# EAGLE board Proiect TSC v137 (EAGLE 9.7.0)
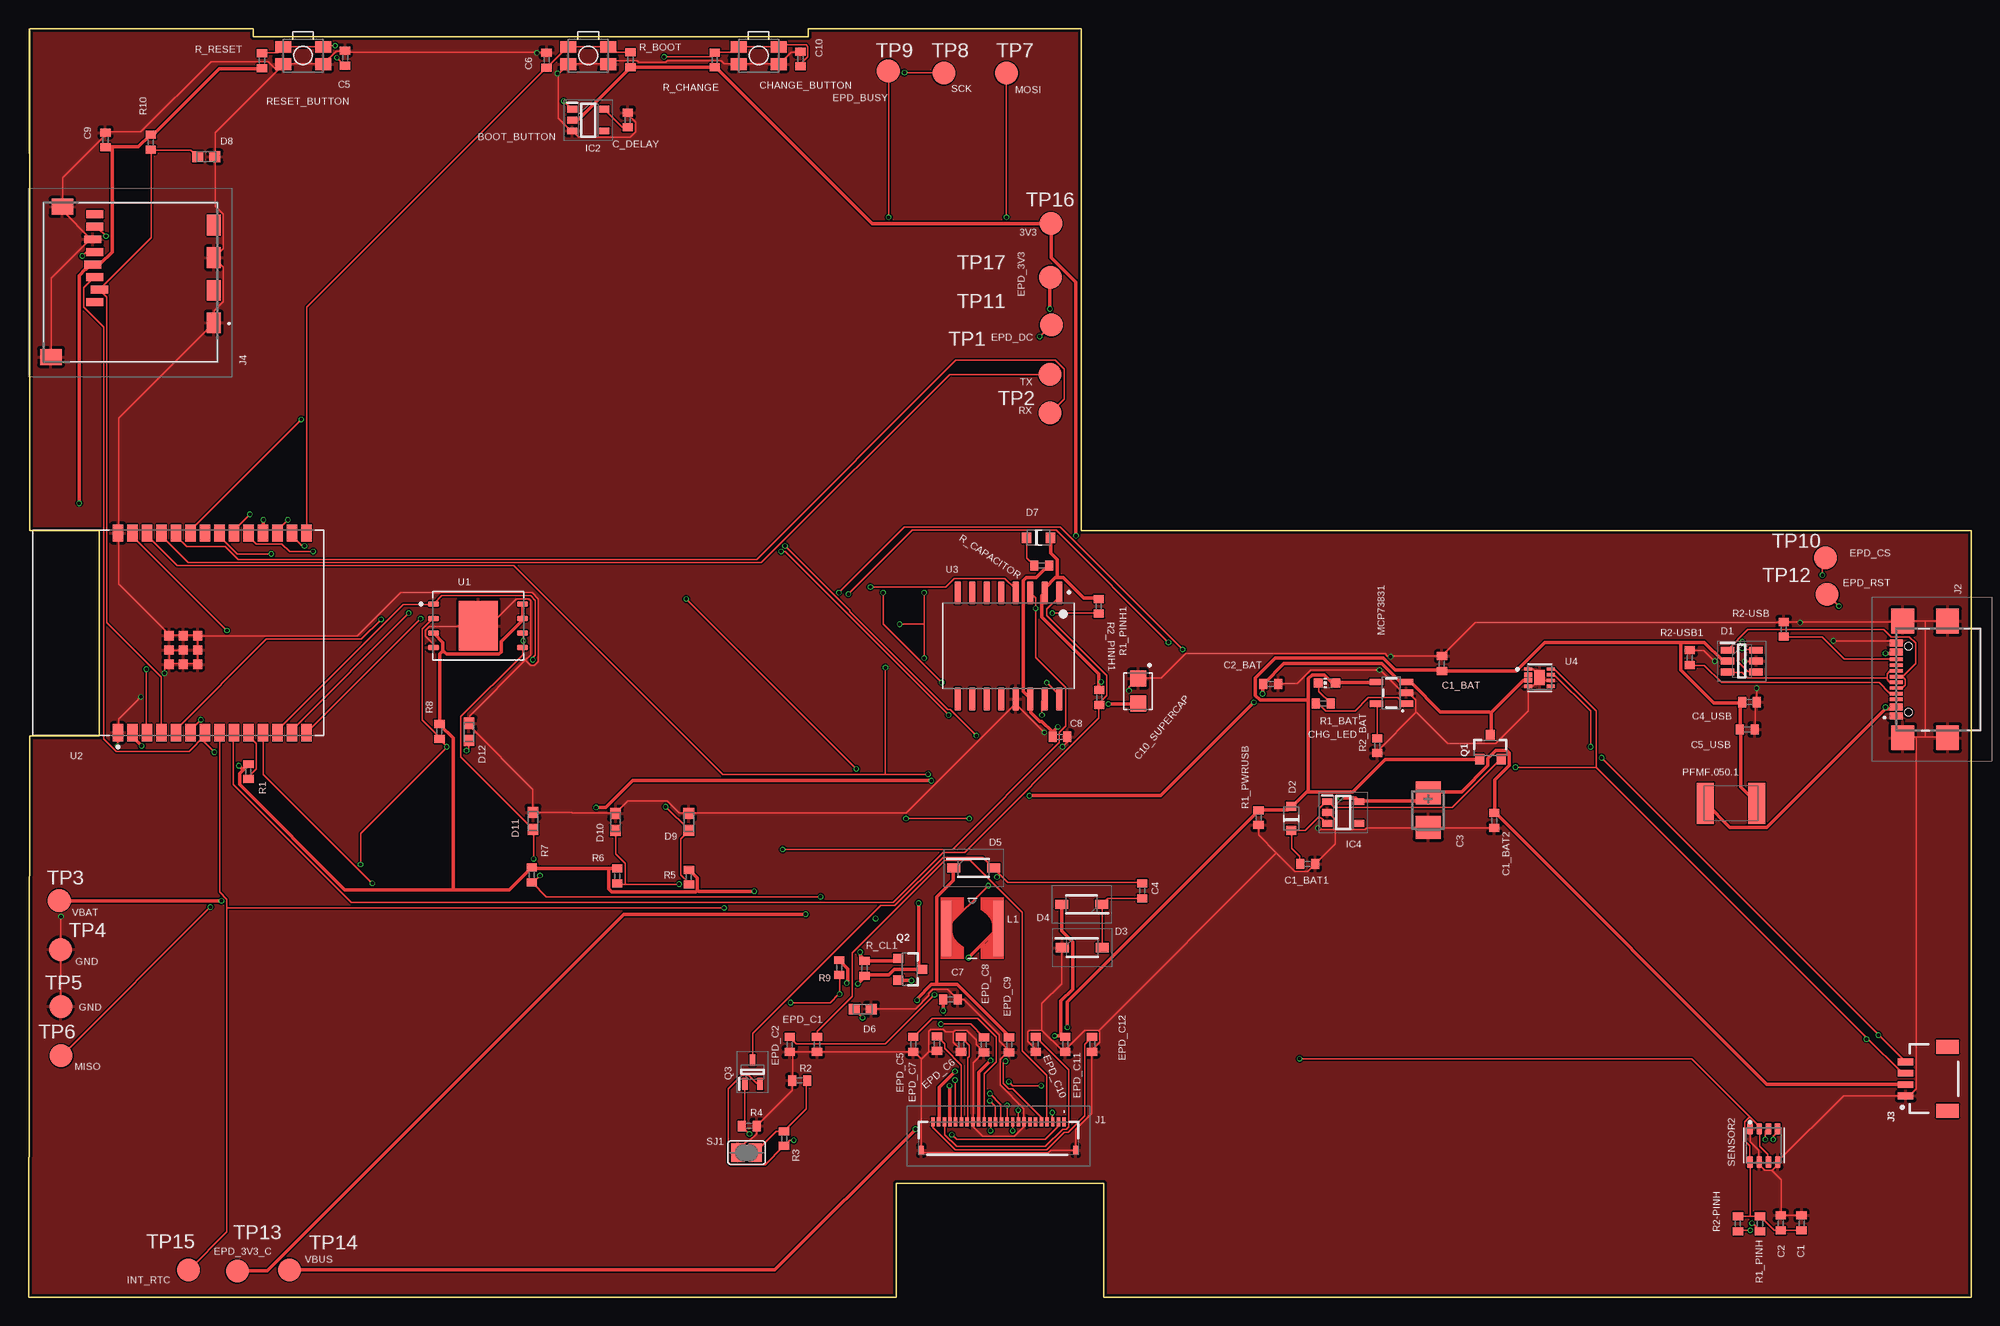
[diagram p0: board, top side]
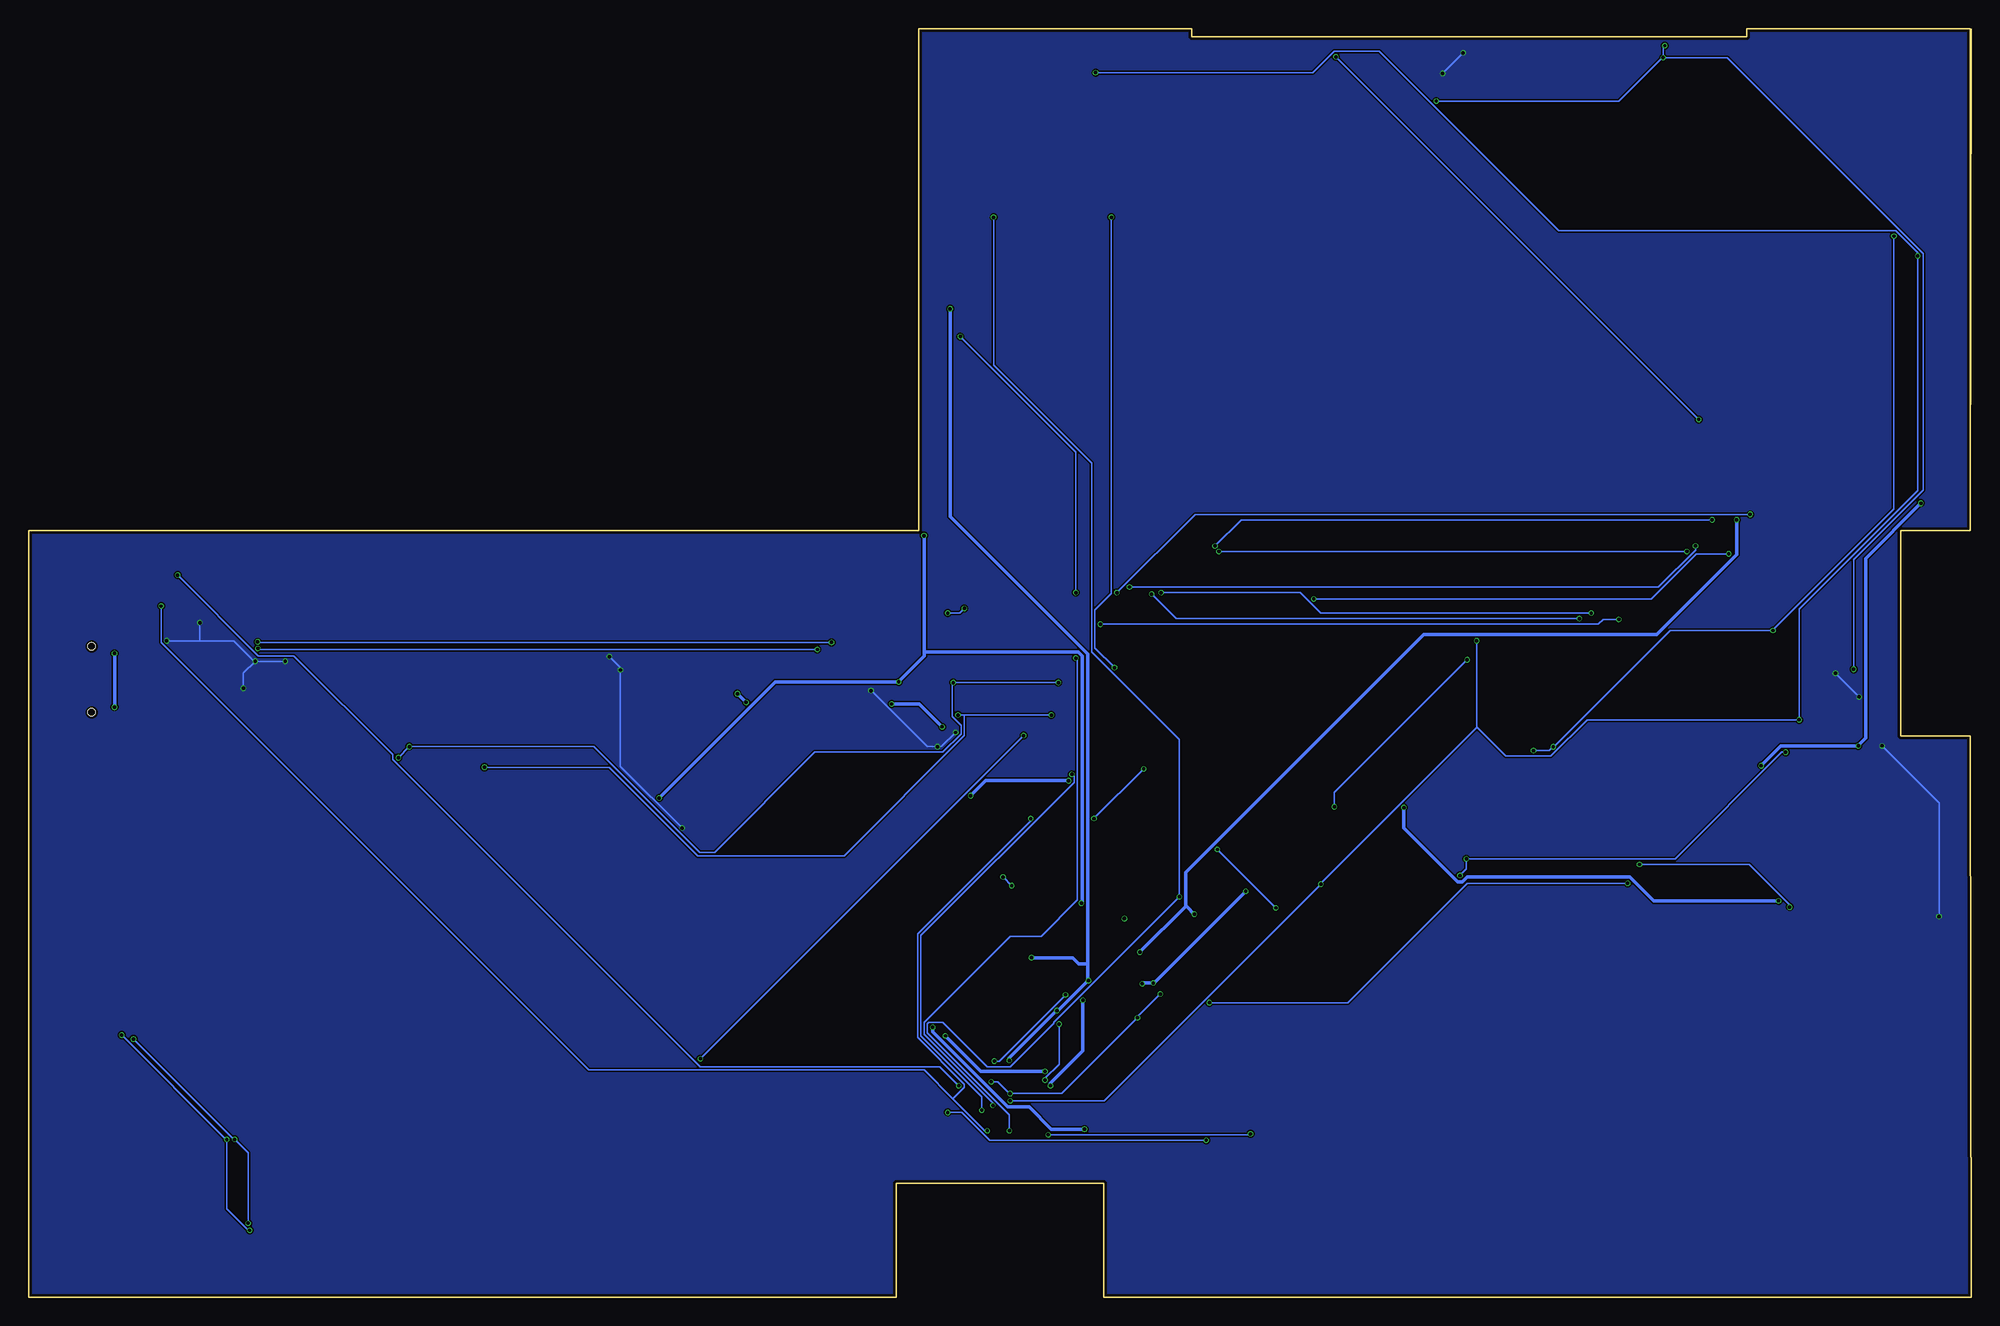
[diagram p1: board, bottom side, seen from below]

Size 170.2 x 111.2 mm. Coordinates in mm from the lower left corner, seen from the top.
Outline: 0,111.2 0.1,67.2
Outline: 0.1,67.2 6.2,67.2 6.2,49.21 0.1,49.21 0,0 76,0 76,10 94.2,10 94.2,0 170.2,0 170.2,67.2 92.2,67.2 92.2,111.2 68.3,111.2 68.3,110.5 19.7,110.5 19.7,111.2 0.1,111.2 0.1,67.2
Copper layers (1*16): Top 0.035mm / dielectric 1.6mm / Bottom 0.035mm
Design rules "jlcpcb-2layers2.dru *": minimum track width 0.15mm, minimum drill 0.3mm, track to track 5mil, track to pad 5mil, pad to pad 5mil, via to via 5mil, smd to smd 5mil, copper to edge 0.2mm, drill to drill 6mil, minimum pad ring 10mil, minimum via ring 3mil, stop-mask expansion 4mil, vias tented up to drill 0mil, thermal gap 10mil
Net classes: 1 power: width 0.3 mm

## Footprints (pad centres in the part's own frame; a part is rotated, then mirrored left to right if it is on the bottom)
MYBUTTON = smd 1.4 x 1.05: 1 1.75,0.75; 2 -1.75,0.75; 3 -1.75,-0.75; 4 1.75,-0.75
EAGLE-LTSPICE_C0402 = smd 0.7 x 0.9: 1 -0.65,0; 2 0.65,0
RCL_CT3528 = smd 2 x 2.2: + -1.5,0; - 1.5,0
ESP32_WROVER_EAGLE-LTSPICE_C0402 = smd 0.7 x 0.9: 1 -0.65,0; 2 0.65,0
CAPCP3225X100N = smd 1.4 x 1.4: 1 -1.1,0; 2 1.1,0
ADAFRUIT_CHIP-LED0603 = smd 0.8 x 0.8: A 0,-0.75; C 0,0.75
SOT95P280X145-6N = smd 1.2 x 0.6: 1 -1.25,0.95; 2 -1.25,0; 3 -1.25,-0.95; 4 1.25,-0.95; 5 1.25,0; 6 1.25,0.95
ESP32_WROVER_AVX---SD0805S020S1R0_AVX_SD0805S020S1R0_0 = smd 0.8 x 0.9: 1 -1.05,0; 2 1.05,0
SOD3716X135N = smd 1.15 x 0.8: 1 -1.75,0; 2 1.75,0
DIOC1608X36N = smd 0.97 x 0.94: 1 -0.75,0; 2 0.75,0
SOT95P280X125-5N = smd 0.9 x 0.6: 1 -1.4,0.95; 2 -1.4,0; 3 -1.4,-0.95; 4 1.4,-0.95; 5 1.4,0.95
SOT95P280X120-5N = smd 0.9 x 0.6: 1 -1.4,0.95; 2 -1.4,0; 3 -1.4,-0.95; 4 1.4,-0.95; 5 1.4,0.95
FH34SRJ24S05SH99 = smd 0.3 x 0.8: 1 5.75,1.45; 2 5.25,1.45; 3 4.75,1.45; 4 4.25,1.45; 5 3.75,1.45; 6 3.25,1.45; 7 2.75,1.45; 8 2.25,1.45; 9 1.75,1.45; 10 1.25,1.45; 11 0.75,1.45; 12 0.25,1.45; 13 -0.25,1.45; 14 -0.75,1.45; 15 -1.25,1.45; 16 -1.75,1.45; 17 -2.25,1.45; 18 -2.75,1.45; 19 -3.25,1.45; 20 -3.75,1.45; 21 -4.25,1.45; 22 -4.75,1.45; 23 -5.25,1.45; 24 -5.75,1.45 | smd 0.4 x 0.8: MP1 6.75,-1.05; MP2 -6.75,-1.05
SAMACSYS_PARTS_USB4110GFA = smd 0.3 x 1.15: A1 -3.35,3.678; A4 -2.55,3.678; A5 -1.25,3.678; A6 -0.25,3.678; A7 0.25,3.678; A8 1.25,3.678; A9 2.55,3.678; A12 3.35,3.678; B1 3.05,3.678; B4 2.25,3.678; B5 1.75,3.678; B6 0.75,3.678; B7 -0.75,3.678; B8 -1.75,3.678; B9 -2.25,3.678; B12 -3.05,3.678 | smd 2.18 x 2: MP1 -5.11,-0.827; MP2 5.11,-0.827; MP3 -5.11,3.103; MP4 5.11,3.103 | hole 0.65: -2.89,2.603; 2.89,2.603
JST04_1MM_RA = smd 0.6 x 1.35: 1 -1.5,0; 2 -0.5,0; 3 0.5,0; 4 1.5,0 | smd 1.2 x 2: NC1 2.8,-3.675; NC2 -2.8,-3.675
112ATAARR03ATTEND = smd 1.8 x 1.2: G1 10.6,10.4; G2 4.9,10.4; S1 7.75,10.4; S2 2.05,10.4 | smd 1.4 x 1.9: G3 13.6,-3.85; G4 0.45,-2.85 | smd 0.7 x 1.5: P1 8.8,0; P2 7.7,0.4; P3 6.6,0; P4 5.5,-0.2; P5 4.4,0; P6 3.3,-0.2; P7 2.2,0; P8 1.1,0
IND_4828-WE-TPC_WRE = smd 0.889 x 4.826: 1 -2.286,0; 2 2.286,0
ESP32_WROVER_SPARKFUN-IC-POWER_SOT23-5 = smd 0.55 x 1.2: 1 -0.95,-1.3; 2 0,-1.3; 3 0.95,-1.3; 4 0.95,1.3; 5 -0.95,1.3
ESP32C6_VARISTOR_CT/CN1812 = smd 1.5 x 3.6: 1 -2.25,0; 2 2.25,0
ESP32_WROVER_SPARKFUN-DISCRETESEMI_SOT23-3 = smd 0.8 x 0.9: 1 -0.95,-1; 2 0.95,-1; 3 0,1.1
SOT65P210X110-3N = smd 1.05 x 0.5: 1 -1.05,0.65; 2 -1.05,-0.65; 3 1.05,0
ESP32_WROVER_EAGLE-LTSPICE_R0402 = smd 0.7 x 0.9: 1 -0.65,0; 2 0.65,0
ESP32_WROVER_BME680_PSON80P300X300X100-8N = smd 1.016 x 0.5: 1 1.458,1.2; 2 1.458,0.4; 3 1.458,-0.4; 4 1.458,-1.2; 5 -1.458,-1.22; 6 -1.458,-0.4; 7 -1.458,0.4; 8 -1.458,1.2
SJ = smd 1.168 x 1.6: 1 -0.762,0; 2 0.762,0
TP20R = smd 2 x 2: TP 0,0
SON127P600X800X80-9N = smd 0.94 x 0.44: 1 -3.895,1.905; 2 -3.895,0.635; 3 -3.895,-0.635; 4 -3.895,-1.905; 5 3.895,-1.905; 6 3.895,-0.635; 7 3.895,0.635; 8 3.895,1.905 | smd 3.4 x 4.3: 9 0,0
XCVR_ESP32-C6-WROOM-1-N8 = smd 1.5 x 0.9: 1 -8.75,5.26; 2 -8.75,3.99; 3 -8.75,2.72; 4 -8.75,1.45; 5 -8.75,0.18; 6 -8.75,-1.09; 7 -8.75,-2.36; 8 -8.75,-3.63; 9 -8.75,-4.9; 10 -8.75,-6.17; 11 -8.75,-7.44; 12 -8.75,-8.71; 13 -8.75,-9.98; 14 -8.75,-11.25; 15 8.75,-11.25; 16 8.75,-9.98; 17 8.75,-8.71; 18 8.75,-7.44; 19 8.75,-6.17; 20 8.75,-4.9; 21 8.75,-3.63; 22 8.75,-2.36; 23 8.75,-1.09; 24 8.75,0.18; 25 8.75,1.45; 26 8.75,2.72; 27 8.75,3.99; 28 8.75,5.26 | smd 0.8 x 0.8: 29_1 -2.755,0.79; 29_2 -1.505,0.79; 29_3 -0.255,0.79; 29_4 -2.755,-0.46; 29_5 -1.505,-0.46; 29_6 -0.255,-0.46; 29_7 -2.755,-1.71; 29_8 -1.505,-1.71; 29_9 -0.255,-1.71
SOIC127P1032X265-16N = smd 2.05 x 0.59: 1 -4.655,4.445; 2 -4.655,3.175; 3 -4.655,1.905; 4 -4.655,0.635; 5 -4.655,-0.635; 6 -4.655,-1.905; 7 -4.655,-3.175; 8 -4.655,-4.445; 9 4.655,-4.445; 10 4.655,-3.175; 11 4.655,-1.905; 12 4.655,-0.635; 13 4.655,0.635; 14 4.655,1.905; 15 4.655,3.175; 16 4.655,4.445
SON50P200X200X80-9N = smd 0.76 x 0.27: 1 -0.985,0.75; 4 -0.985,-0.75; 5 0.985,-0.75; 6 0.985,-0.25; 7 0.985,0.25; 8 0.985,0.75 | smd 0.813 x 0.406: 2 -0.985,0.25; 3 -0.985,-0.25 | smd 0.9 x 1.3: 9 0,0

## Placement (x,y rotation side)
BOOT_BUTTON  BUTTON_CUSYOMV1  [MYBUTTON]  49.03,108.83 180 top
C1  100nF  [EAGLE-LTSPICE_C0402]  155.32,6.53 90 top
C1_BAT  4.7uF  [EAGLE-LTSPICE_C0402]  123.81,55.55 90 top
C1_BAT1  4.7uF  [EAGLE-LTSPICE_C0402]  112.05,37.99 0 top
C1_BAT2  4.7uF  [EAGLE-LTSPICE_C0402]  128.39,41.79 90 top
C2  100nF  [EAGLE-LTSPICE_C0402]  153.5,6.53 90 top
C2_BAT  4.7uF  [EAGLE-LTSPICE_C0402]  108.82,53.75 0 top
C3  100uF TANT  [RCL_CT3528]  122.61,42.7 270 top
C4  4.7uF/25V  [EAGLE-LTSPICE_C0402]  97.56,35.64 90 top
C4_USB  100nF  [EAGLE-LTSPICE_C0402]  150.75,52.17 0 top
C5  1uF  [EAGLE-LTSPICE_C0402]  27.73,108.61 90 top
C5_USB  4.7uf  [EAGLE-LTSPICE_C0402]  150.56,49.77 0 top
C6  100nF  [EAGLE-LTSPICE_C0402]  45.38,108.43 90 top
C7  10uF  [EAGLE-LTSPICE_C0402]  80.77,26.13 0 top
C8  100nF  [EAGLE-LTSPICE_C0402]  90.36,49.13 0 top
C9  100nF  [ESP32_WROVER_EAGLE-LTSPICE_C0402]  6.74,101.43 90 top
C10  100nF  [EAGLE-LTSPICE_C0402]  67.62,108.53 90 top
C10_SUPERCAP  CPH3225A  [CAPCP3225X100N]  97.19,53.14 270 top
C_DELAY  100nF  [EAGLE-LTSPICE_C0402]  52.49,103.19 90 top
CHANGE_BUTTON  BUTTON_CUSYOMV1  [MYBUTTON]  63.96,108.83 180 top
CHG_LED  [ADAFRUIT_CHIP-LED0603]  113.74,53.85 90 top
D1  USBLC6-2SC6Y  [SOT95P280X145-6N]  150.08,55.77 0 top
D2  ESP32_WROVER_AVX---SD0805S020S1R0_AVX_SD0805S020S1R0_0_0AVX_SD0805S020S1R0_0_0  [ESP32_WROVER_AVX---SD0805S020S1R0_AVX_SD0805S020S1R0_0]  110.62,41.98 90 top
D3  MBR0530  [SOD3716X135N]  92.31,30.65 0 top
D4  MBR0530  [SOD3716X135N]  92.25,34.45 180 top
D5  MBR0530  [SOD3716X135N]  82.79,37.65 0 top
D6  PGB1010603MR  [DIOC1608X36N]  73.08,25.27 0 top
D7  ESP32_WROVER_AVX---SD0805S020S1R0_AVX_SD0805S020S1R0_0_0AVX_SD0805S020S1R0_0_0  [ESP32_WROVER_AVX---SD0805S020S1R0_AVX_SD0805S020S1R0_0]  88.47,66.58 0 top
D8  PGB1010603MR  [DIOC1608X36N]  15.56,99.97 0 top
D9  PGB1010603MR  [DIOC1608X36N]  57.84,41.67 90 top
D10  PGB1010603MR  [DIOC1608X36N]  51.42,41.67 90 top
D11  PGB1010603MR  [DIOC1608X36N]  44.2,41.77 90 top
D12  PGB1010603MR  [DIOC1608X36N]  38.58,49.57 90 top
EPD_C1  1uF/50V  [EAGLE-LTSPICE_C0402]  69.07,22.17 90 top
EPD_C2  1uF/50V  [EAGLE-LTSPICE_C0402]  66.68,22.17 90 top
EPD_C5  0.1uF/50V  [EAGLE-LTSPICE_C0402]  77.51,22.19 90 top
EPD_C6  1uF/50V  [EAGLE-LTSPICE_C0402]  81.69,22.17 90 top
EPD_C7  1uF/50V  [EAGLE-LTSPICE_C0402]  79.58,22.25 90 top
EPD_C8  1uF/50V  [EAGLE-LTSPICE_C0402]  83.69,22.15 90 top
EPD_C9  1uF/50V  [EAGLE-LTSPICE_C0402]  85.9,22.15 90 top
EPD_C10  1uF/50V  [EAGLE-LTSPICE_C0402]  88.23,22.19 90 top
EPD_C11  1uF/50V  [EAGLE-LTSPICE_C0402]  90.81,22.19 90 top
EPD_C12  1uF/50V  [EAGLE-LTSPICE_C0402]  93.17,22.19 90 top
IC2  BD5229G-TR  [SOT95P280X125-5N]  49.03,103.18 0 top
IC4  XC6220A331MR-G  [SOT95P280X120-5N]  115.17,42.49 0 top
J1  FH34SRJ-24S-0.5SH_99_  [FH34SRJ24S05SH99]  84.97,13.94 0 top
J2  SAMACSYS_PARTS_USB4110-GF-A  [SAMACSYS_PARTS_USB4110GFA]  167.28,54.16 90 top
J3  QWIIC_RIGHT_ANGLE  [JST04_1MM_RA]  164.43,19.16 90 top
J4  112A-TAAR-R03_ATTEND  [112ATAARR03ATTEND]  5.82,96.02 270 top
L1  68uH  [IND_4828-WE-TPC_WRE]  82.67,32.35 0 top
MCP73831  ESP32_WROVER_SPARKFUN-IC-POWER_MCP73831  [ESP32_WROVER_SPARKFUN-IC-POWER_SOT23-5]  119.38,52.99 90 top
PFMF.050.1  ESP32C6_VARISTORCN1812  [ESP32C6_VARISTOR_CT/CN1812]  149.14,43.3 0 top
Q1  20V/4.2A/52mΩ/1.4W  [ESP32_WROVER_SPARKFUN-DISCRETESEMI_SOT23-3]  128.06,48.16 0 top
Q2  20V/4.2A/52mΩ/1.4W  [ESP32_WROVER_SPARKFUN-DISCRETESEMI_SOT23-3]  77.18,28.76 270 top
Q3  SI1308EDL-T1-GE3  [SOT65P210X110-3N]  63.42,19.75 90 top
R1  10K  [ESP32_WROVER_EAGLE-LTSPICE_R0402]  19.26,46.08 90 top
R1_BAT  200  [ESP32_WROVER_EAGLE-LTSPICE_R0402]  113.43,52.05 0 top
R1_PINH  10K  [ESP32_WROVER_EAGLE-LTSPICE_R0402]  151.68,6.47 90 top
R1_PINH1  10K  [ESP32_WROVER_EAGLE-LTSPICE_R0402]  93.75,60.57 90 top
R1_PWRUSB  100K  [ESP32_WROVER_EAGLE-LTSPICE_R0402]  107.75,42.04 90 top
R2  2.2  [ESP32_WROVER_EAGLE-LTSPICE_R0402]  67.55,19.01 0 top
R2-PINH  10K  [ESP32_WROVER_EAGLE-LTSPICE_R0402]  149.74,6.47 90 top
R2-USB  5k1  [ESP32_WROVER_EAGLE-LTSPICE_R0402]  153.75,58.55 90 top
R2-USB1  5k1  [ESP32_WROVER_EAGLE-LTSPICE_R0402]  145.52,56.07 90 top
R2_BAT  2K  [ESP32_WROVER_EAGLE-LTSPICE_R0402]  118.14,48.35 90 top
R2_PINH1  10K  [ESP32_WROVER_EAGLE-LTSPICE_R0402]  93.79,52.57 90 top
R3  0.47  [ESP32_WROVER_EAGLE-LTSPICE_R0402]  66.19,13.93 90 top
R4  10K  [ESP32_WROVER_EAGLE-LTSPICE_R0402]  63.13,15.03 0 top
R5  10K  [ESP32_WROVER_EAGLE-LTSPICE_R0402]  57.85,36.83 90 top
R6  10K  [ESP32_WROVER_EAGLE-LTSPICE_R0402]  51.57,36.93 90 top
R7  10K  [ESP32_WROVER_EAGLE-LTSPICE_R0402]  44.09,37.03 90 top
R8  10K  [ESP32_WROVER_EAGLE-LTSPICE_R0402]  35.99,49.61 90 top
R9  10K  [ESP32_WROVER_EAGLE-LTSPICE_R0402]  71.01,28.91 90 top
R10  10K  [ESP32_WROVER_EAGLE-LTSPICE_R0402]  10.71,101.23 89.5 top
R_BOOT  10K  [ESP32_WROVER_EAGLE-LTSPICE_R0402]  52.73,108.47 90 top
R_CAPACITOR  15  [ESP32_WROVER_EAGLE-LTSPICE_R0402]  88.75,64.14 0 top
R_CHANGE  10K  [ESP32_WROVER_EAGLE-LTSPICE_R0402]  60.12,108.44 90 top
R_CL1  10K  [ESP32_WROVER_EAGLE-LTSPICE_R0402]  73.23,28.85 90 top
R_RESET  10K  [ESP32_WROVER_EAGLE-LTSPICE_R0402]  20.45,108.39 90 top
RESET_BUTTON  BUTTON_CUSYOMV1  [MYBUTTON]  24.05,108.83 180 top
SENSOR2  BME688  [ESP32_WROVER_BME680_PSON80P300X300X100-8N]  152.01,13.32 90 top
SJ1  [SJ]  62.9,12.69 0 top
TP1  TPTP20R  [TP20R]  89.47,80.91 0 top
TP2  TPTP20R  [TP20R]  89.49,77.51 0 top
TP3  TPTP20R  [TP20R]  2.69,34.79 0 top
TP4  TPTP20R  [TP20R]  2.81,30.49 0 top
TP5  TPTP20R  [TP20R]  2.83,25.49 0 top
TP6  TPTP20R  [TP20R]  2.85,21.19 0 top
TP7  TPTP20R  [TP20R]  85.67,107.29 0 top
TP8  TPTP20R  [TP20R]  80.19,107.29 0 top
TP9  TPTP20R  [TP20R]  75.31,107.49 0 top
TP10  TPTP20R  [TP20R]  157.4,64.81 0 top
TP11  TPTP20R  [TP20R]  89.61,85.21 0 top
TP12  TPTP20R  [TP20R]  157.55,61.61 0 top
TP13  TPTP20R  [TP20R]  18.3,2.31 0 top
TP14  TPTP20R  [TP20R]  22.85,2.42 0 top
TP15  TPTP20R  [TP20R]  14,2.41 0 top
TP16  TPTP20R  [TP20R]  89.55,94.11 0 top
TP17  TPTP20R  [TP20R]  89.51,89.41 0 top
U1  W25Q512JVEIQ  [SON127P600X800X80-9N]  39.39,58.86 0 top
U2  ESP32-C6-WROOM-1-N8  [XCVR_ESP32-C6-WROOM-1-N8]  13.1,58.24 90 top
U3  DS3231SN#  [SOIC127P1032X265-16N]  85.85,57.1 270 top
U4  MAX17048G+T10  [SON50P200X200X80-9N]  132.37,54.32 0 top

## Library data of the parts
BOOT_BUTTON CHANGE_BUTTON CHG_LED PFMF.050.1 RESET_BUTTON SJ1 TP1-TP17 = DeskAssistant v19 v1
C1 C1_BAT C1_BAT1 C1_BAT2 C2 C2_BAT C4 C4_USB C5 C5_USB C6-C10 C_DELAY EPD_C1 EPD_C2 EPD_C5-EPD_C12 = DeskAssistant v19 v1; SPICEMODEL: NONE; SPICEPREFIX: C
C3 = DeskAssistant v19 v1; SPICEPREFIX: C
C10_SUPERCAP = DeskAssistant v19 v1; AVAILABILITY: Not in stock; CHECK_PRICES: https://www.snapeda.com/parts/CPH3225A/Seiko+Instruments/view-part/?ref=eda; DESCRIPTION: 11 mF (EDLC) Supercapacitor 3.3 V 1210 (3225 Metric) - -; MF: Seiko Instruments; MP: CPH3225A; PACKAGE: 1210 Seiko; PRICE: None; PURCHASE-URL: https://www.snapeda.com/api/url_track_click_mouser/?unipart_id=562593&manufacturer=Seiko Instruments&part_name=CPH3225A&search_term=None; SNAPEDA_LINK: https://www.snapeda.com/parts/CPH3225A/Seiko+Instruments/view-part/?ref=snap
D1 = DeskAssistant v19 v1; AVAILABILITY: In Stock; CHECK_PRICES: https://www.snapeda.com/parts/USBLC6-2SC6Y/STMicroelectronics/view-part/?ref=eda; DESCRIPTION: 17V Clamp 5A (8/20µs) Ipp Tvs Diode Surface Mount SOT-23-6; MF: STMicroelectronics; MP: USBLC6-2SC6Y; PACKAGE: SOT-23-6 STMicroelectronics; PRICE: None; SNAPEDA_LINK: https://www.snapeda.com/parts/USBLC6-2SC6Y/STMicroelectronics/view-part/?ref=snap
D2 D7 = DeskAssistant v19 v1; CENTROID_NOT_SPECIFIED: No; DATASHEET: http://datasheets.avx.com/schottky.pdf; DIGIKEY_DESCRIPTION: DIODE SCHOTTKY 20V 1A 0805; DIGIKEY_PART_NUMBER: 478-7800-1-ND; LEAD_FREE: yes; MF: AVX; MOUSER_PART_NUMBER: 581-SD0805S020S1R0; PACKAGE: 0805 (2012 metric); PREFIX: D; ROHS: yes; TEMPERATURE_RANGE_HIGH: +125°C; TEMPERATURE_RANGE_LOW: -55°C
D3-D5 = DeskAssistant v19 v1; AVAILABILITY: In Stock; CHECK_PRICES: https://www.snapeda.com/parts/MBR0530/Onsemi/view-part/?ref=eda; DESCRIPTION: Diode Schottky 30 V 500mA Surface Mount SOD-123; MF: ON Semiconductor; MP: MBR0530; PACKAGE: SOD-123-2 ON Semiconductor; PRICE: None; PURCHASE-URL: https://www.snapeda.com/api/url_track_click_mouser/?unipart_id=179458&manufacturer=ON Semiconductor&part_name=MBR0530&search_term=None; SNAPEDA_LINK: https://www.snapeda.com/parts/MBR0530/Onsemi/view-part/?ref=snap
D6 D8-D12 = DeskAssistant v19 v1; AVAILABILITY: In Stock; CHECK_PRICES: https://www.snapeda.com/parts/PGB1010603MR/Littelfuse/view-part/?ref=eda; DESCRIPTION: 150V (Typ) Clamp - Ipp Tvs Diode Surface Mount 0603 (1608 Metric); MF: Littelfuse Inc.; MP: PGB1010603MR; PACKAGE: 0603 Littelfuse Inc.; PRICE: None; PURCHASE-URL: https://www.snapeda.com/api/url_track_click_mouser/?unipart_id=5659453&manufacturer=Littelfuse Inc.&part_name=PGB1010603MR&search_term=None; SNAPEDA_LINK: https://www.snapeda.com/parts/PGB1010603MR/Littelfuse/view-part/?ref=snap
IC2 = DeskAssistant v19 v1; DESCRIPTION: Voltage Detector with Adjustable Delay Time: CMOS processes are utilized to develop high precision, low current consumption CMOS reset ICs that allow arbitrary setting of the delay time. The extensive lineup includes both Nch Open Drain and CMOS output types in a wide range of detection voltages (from 2.3V to 6.0V, in 0.1V steps), enabling selection of the ideal solution based on customer requirements. In addition, the entire series is of course both lead-free and RoHS-compliant.; HEIGHT: 1.25mm; MANUFACTURER_NAME: ROHM Semiconductor; MANUFACTURER_PART_NUMBER: BD5229G-TR; MOUSER_PART_NUMBER: 755-BD5229G-TR; MOUSER_PRICE-STOCK: https://www.mouser.co.uk/ProductDetail/ROHM-Semiconductor/BD5229G-TR?qs=4kLU8WoGk0vvnhrrYwdszw%3D%3D
IC4 = DeskAssistant v19 v1; DESCRIPTION: LDO Voltage Regulators; HEIGHT: 1.2mm; MANUFACTURER_NAME: Torex; MANUFACTURER_PART_NUMBER: XC6220A331MR-G; MOUSER_PART_NUMBER: 865-XC6220A331MR-G; MOUSER_PRICE-STOCK: https://www.mouser.co.uk/ProductDetail/Torex-Semiconductor/XC6220A331MR-G?qs=AsjdqWjXhJ8ZSWznL1J0gg%3D%3D
J1 = DeskAssistant v19 v1; DESCRIPTION: 24 Position FFC, FPC Connector Contacts, Top and Bottom 0.020" (0.50mm) Surface Mount, Right Angle; HEIGHT: 1.1mm; MANUFACTURER_NAME: Hirose; MANUFACTURER_PART_NUMBER: FH34SRJ-24S-0.5SH(99); MOUSER_PART_NUMBER: 798-FH34SRJ24S05SH99; MOUSER_PRICE-STOCK: https://www.mouser.co.uk/ProductDetail/Hirose-Connector/FH34SRJ-24S-0.5SH99?qs=vcbW%252B4%252BSTIpKBl5ap9J8Fw%3D%3D
J2 = DeskAssistant v19 v1; DESCRIPTION: CONN USB 2.0 TYPE-C R/A SMT; HEIGHT: 3.26mm; MANUFACTURER_NAME: GCT (GLOBAL CONNECTOR TECHNOLOGY); MANUFACTURER_PART_NUMBER: USB4110-GF-A; MOUSER_PART_NUMBER: 640-USB4110-GF-A; MOUSER_PRICE-STOCK: https://www.mouser.co.uk/ProductDetail/GCT/USB4110-GF-A?qs=KUoIvG%2F9IlYiZvIXQjyJeA%3D%3D
J3 = DeskAssistant v19 v1; PROD_ID: CONN-13694
J4 = DeskAssistant v19 v1; DESCRIPTION: Micro SD Card Socket, Push-Push Type, Top Mount, SMT, H=1.83mm, 10u; HEIGHT: 1.9mm; MANUFACTURER_NAME: ATTEND; MANUFACTURER_PART_NUMBER: 112A-TAAR-R03 ATTEND
L1 = DeskAssistant v19 v1; COPYRIGHT: Copyright (C) 2024 Ultra Librarian. All rights reserved.; MANUFACTURER_PART_NUMBER: 744043680; MFR_NAME: Wurth Electronics
MCP73831 = DeskAssistant v19 v1; PROD_ID: IC-09995
Q1 Q2 = DeskAssistant v19 v1; PROD_ID: TRAN-14388
Q3 = DeskAssistant v19 v1; AVAILABILITY: In Stock; CHECK_PRICES: https://www.snapeda.com/parts/SI1308EDL-T1-GE3/Vishay+Siliconix/view-part/?ref=eda; DESCRIPTION: Si1308EDL-T1-GE3 N-channel MOSFET Transistor, 1.5 A, 30 V, 3-Pin SC-70 | Siliconix / Vishay SI1308EDL-T1-GE3; MF: Vishay Siliconix; MP: SI1308EDL-T1-GE3; PACKAGE: SOT-323 Vishay Semiconductor; PRICE: None; PURCHASE-URL: https://www.snapeda.com/api/url_track_click_mouser/?unipart_id=274603&manufacturer=Vishay Siliconix&part_name=SI1308EDL-T1-GE3&search_term=None; SNAPEDA_LINK: https://www.snapeda.com/parts/SI1308EDL-T1-GE3/Vishay+Siliconix/view-part/?ref=snap
R1 R1_BAT R1_PINH R1_PINH1 R1_PWRUSB R2 R2-PINH R2-USB R2-USB1 R2_BAT R2_PINH1 R3-R10 R_BOOT R_CAPACITOR R_CHANGE R_CL1 R_RESET = DeskAssistant v19 v1; SPICEMODEL: NONE; SPICEPREFIX: R
SENSOR2 = DeskAssistant v19 v1; AVAILABILITY: Unavailable; DESCRIPTION: Integrated Environmental Unit; MF: Bosch Sensortec; MP: BME680; PACKAGE: LGA-8 Bosch Tools; PRICE: None
U1 = DeskAssistant v19 v1; AVAILABILITY: In Stock; CHECK_PRICES: https://www.snapeda.com/parts/W25Q512JVEIQ/Winbond+Electronics/view-part/?ref=eda; DESCRIPTION: FLASH - NOR Memory IC 512Mb (64M x 8) SPI - Quad I/O 133 MHz 8-WSON (8x6); MF: Winbond Electronics; MP: W25Q512JVEIQ; PACKAGE: Package; PRICE: None; SNAPEDA_LINK: https://www.snapeda.com/parts/W25Q512JVEIQ/Winbond+Electronics/view-part/?ref=snap
U2 = DeskAssistant v19 v1; AVAILABILITY: In Stock; CHECK_PRICES: https://www.snapeda.com/parts/ESP32-C6-WROOM-1-N8/Espressif+Systems/view-part/?ref=eda; DESCRIPTION: Multiprotocol Modules ESP32-C6 module, Wi-Fi 6 in 2.4 GHz band, Bluetooth 5, Zigbee 3.0 and Thread. ESP34-WROOM Compatible - ENGINEERING SAMPLE; MF: Espressif Systems; MP: ESP32-C6-WROOM-1-N8; PACKAGE: None; PRICE: None; SNAPEDA_LINK: https://www.snapeda.com/parts/ESP32-C6-WROOM-1-N8/Espressif+Systems/view-part/?ref=snap
U3 = DeskAssistant v19 v1; AVAILABILITY: In Stock; CHECK_PRICES: https://www.snapeda.com/parts/DS3231SN%23/Analog+Devices/view-part/?ref=eda; DESCRIPTION: Extremely Accurate I²C-Integrated RTC/TCXO/Crystal; MF: Analog Devices; MP: DS3231SN#; PACKAGE: SOIC-16 Maxim; PRICE: None; PURCHASE-URL: https://www.snapeda.com/api/url_track_click_mouser/?unipart_id=99048&manufacturer=Analog Devices&part_name=DS3231SN#&search_term=None; SNAPEDA_LINK: https://www.snapeda.com/parts/DS3231SN%23/Analog+Devices/view-part/?ref=snap
U4 = DeskAssistant v19 v1; AVAILABILITY: In Stock; CHECK_PRICES: https://www.snapeda.com/parts/MAX17048G+T10/Analog+Devices/view-part/?ref=eda; DESCRIPTION: 3µA 1-Cell/2-Cell Fuel Gauge with ModelGauge; MF: Analog Devices; MP: MAX17048G+T10; PACKAGE: TDFN-8 Maxim; PRICE: None; PURCHASE-URL: https://www.snapeda.com/api/url_track_click_mouser/?unipart_id=329239&manufacturer=Analog Devices&part_name=MAX17048G+T10&search_term=None; SNAPEDA_LINK: https://www.snapeda.com/parts/MAX17048G+T10/Analog+Devices/view-part/?ref=snap

## Nets
3V3 [power]: C1_BAT2.2 C3.+ C9.1 D7.2 IC2.2 IC4.5 J3.2 J4.P4 Q2.3 R1.2 R1_PINH1.2 R2_PINH1.2 R5.2 R6.2 R7.2 R8.2 R9.2 R10.2 R_BOOT.1 R_CHANGE.1 R_CL1.1 R_RESET.1 TP16.TP U1.3 U1.7 U1.8 U2.2 U3.2
32KHZ: R2_PINH1.1 U2.9 U3.1
DN: D1.1 J2.A7 J2.B7
DP: D1.3 J2.A6 J2.B6
EPD_3V3 [power]: C7.1 J1.16 L1.2 Q2.2 TP17.TP
EPD_3V3_C [power]: Q2.1 R_CL1.2 TP13.TP U2.18
EPD_BUSY: J1.9 TP9.TP U2.26
EPD_CS: D6.1 J1.12 R9.1 TP10.TP U2.11
EPD_DC: J1.11 TP11.TP U2.5
EPD_RST: J1.10 TP12.TP U2.21
FLASH_CS: D9.1 R5.1 U1.1 U2.12
GDR: J1.2 Q3.1 R4.1
GND: BOOT_BUTTON.1 BOOT_BUTTON.2 C1.2 C1_BAT1.2 C1_BAT2.1 C1_BAT.2 C2.2 C2_BAT.2 C3.- C4_USB.2 C5.2 C5_USB.2 C6.2 C7.2 C8.2 C9.2 C10.2 C10_SUPERCAP.1 C_DELAY.2 CHANGE_BUTTON.1 CHANGE_BUTTON.2 D1.5 D3.1 D6.2 D8.2 D9.2 D10.2 D11.2 D12.2 EPD_C1.1 EPD_C2.1 EPD_C5.1 EPD_C6.1 EPD_C7.1 EPD_C8.1 EPD_C9.1 EPD_C10.1 EPD_C11.1 EPD_C12.1 IC2.3 IC4.2 J1.8 J1.17 J1.MP1 J1.MP2 J2.A1 J2.A12 J2.B1 J2.B12 J2.MP1 J2.MP2 J2.MP3 J2.MP4 J3.1 J4.G1 J4.G2 J4.G3 J4.G4 J4.P6 MCP73831.2 R1_PWRUSB.1 R2-USB1.2 R2-USB.2 R2.1 R2_BAT.1 R4.2 RESET_BUTTON.1 RESET_BUTTON.2 SENSOR2.1 SENSOR2.5 SENSOR2.7 SJ1.1 TP4.TP TP5.TP U1.4 U1.9 U2.1 U2.28 U2.29_1 U2.29_2 U2.29_3 U2.29_4 U2.29_5 U2.29_6 U2.29_7 U2.29_8 U2.29_9 U3.13 U4.1 U4.4 U4.6 U4.9
GPIO8: R1.1 U2.10
I2C_PW: C1.1 C2.1 R1_PINH.2 R2-PINH.2 SENSOR2.2 SENSOR2.6 SENSOR2.8 U2.17
INT_RTC: R1_PINH1.1 TP15.TP U2.8 U3.3
IO/BOOT: BOOT_BUTTON.3 BOOT_BUTTON.4 C6.1 R_BOOT.2 U2.15
IO/CHANGE: C10.1 CHANGE_BUTTON.3 CHANGE_BUTTON.4 R_CHANGE.2 U2.23
MISO: D12.1 J4.P7 R8.1 TP6.TP U1.2 U2.27
MOSI: D11.1 J1.14 J4.P3 R7.1 TP7.TP U1.5 U2.7
N$1: J2.B5 R2-USB.1
N$2: J2.A5 R2-USB1.1
N$3: C1_BAT1.1 D2.1 IC4.1 IC4.3 Q1.2
N$4: MCP73831.1 R1_BAT.1
N$5: C4.1 D3.2 D4.1
N$6: CHG_LED.C R1_BAT.2
N$7: MCP73831.5 R2_BAT.2
N$8: EPD_C1.2 J1.4
N$9: EPD_C2.2 J1.5
N$10: EPD_C5.2 J1.15
N$11: EPD_C6.2 J1.18
N$12: EPD_C7.2 J1.19
N$13: EPD_C8.2 J1.20
N$15: EPD_C10.2 J1.22
N$16: C_DELAY.1 IC2.5
N$17: D7.1 R_CAPACITOR.1
N$18: EPD_C12.2 J1.24
PREVGH [power]: D5.1 EPD_C9.2 J1.21
PREVGL [power]: D4.2 EPD_C11.2 J1.23
RESE: J1.3 Q3.2 R3.1
RESE`: R2.2 R3.2 SJ1.2
RESET: C5.1 IC2.1 R_RESET.2 RESET_BUTTON.3 RESET_BUTTON.4 U2.3
RTC_RST: U2.16 U3.4
RX: TP2.TP U2.24
SCK: D10.1 J1.13 J4.P5 R6.1 TP8.TP U1.6 U2.6
SCL: J3.4 R2-PINH.1 SENSOR2.4 U2.20 U3.16 U4.7
SDA: J3.3 R1_PINH.1 SENSOR2.3 U2.19 U3.15 U4.8
SRC: C4.2 D5.2 L1.1 Q3.3
SS_SD: D8.1 J4.P2 R10.1 U2.4
TX: TP1.TP U2.25
USB_D+: D1.4 U2.14
USB_D-: D1.6 U2.13
VBAT [power]: C2_BAT.1 MCP73831.3 Q1.3 TP3.TP U4.2 U4.3
VBUS [power]: C1_BAT.1 C4_USB.1 C5_USB.1 CHG_LED.A D1.2 D2.2 MCP73831.4 PFMF.050.1.2 Q1.1 R1_PWRUSB.2 TP14.TP
VRTC [power]: C8.1 C10_SUPERCAP.2 R_CAPACITOR.2 U3.14
VUSB [power]: J2.A4 J2.A9 J2.B4 J2.B9 PFMF.050.1.1

## Tracks (layer width: path | path; a pad name or v marks a point on that pad's centre or on a via)
3V3  (via drill 0.3)
  Top 0.3: 7.34,100.83 9.63,100.83 10.66,101.87 R10.2 10.87,101.87 16.69,107.68 20.43,107.68 R_RESET.1 | 7.34,100.83 6.79,100.83 C9.1 | 7.34,100.83 7.34,91.62 6.3,90.58 5.68,90.58 J4.P4 5.47,90.51 5.05,90.09 4.99,90.09 4.43,89.54 v4.43,69.6 | U1.8 43.28,60.73 43.28,59.55 U1.7 43.28,59.35 41.41,57.48 41.41,56.58 41.2,56.37 36.63,56.37 36.42,56.58 36.29,56.65 | 36.29,56.65 36.01,56.37 36.01,50.28 R8.2 36.08,50.14 37.19,49.03 37.19,35.73 | 36.29,56.65 36.29,57.41 35.52,58.17 U1.3 | v71.67,27.56 71.74,27.63 71.74,28.81 71.05,29.5 R9.2 | v72.64,27.49 73.2,28.05 R_CL1.1 73.27,28.25 75.34,28.25 75.83,28.74 78.25,28.74 Q2.3 77.97,28.88 v77.97,34.56 | 50.83,37.6 44.18,37.6 44.11,37.67 R7.2 43.97,37.6 42.1,35.73 37.19,35.73 | 50.83,37.6 51.52,37.6 R6.2 | 58.59,35.66 58.59,36.77 57.89,37.46 R5.2 | 58.59,35.66 58.45,35.52 51.11,35.52 50.83,35.8 50.83,37.6 | 18.8,46.22 18.49,45.91 18.49,44.94 27.7,35.73 37.19,35.73 | 18.8,46.22 19.25,46.67 R1.2 | v9.9,48.34 9.14,49.1 9.14,49.44 U2.2 | 18.8,46.22 v18.42,46.6 | v63.57,35.59 58.72,35.59 58.59,35.66 | IC2.2 47.64,103.18 48.13,103.18 52.7,107.75 R_BOOT.1 52.84,107.82 60.11,107.82 R_CHANGE.1 60.25,107.75 73.89,94.11 TP16.TP 89.61,93.97 89.61,91.13 91.76,88.99 v91.76,66.76 | 93.76,53.95 93.76,54.64 88.78,59.62 88.78,61.49 88.99,61.7 U3.2 89.06,61.91 89.06,62.19 89.96,63.09 90.09,63.09 | 93.76,53.95 93.76,53.25 R2_PINH1.2 | 90.09,63.09 90.65,63.09 92.45,61.29 93.69,61.29 R1_PINH1.2 | 90.09,63.09 90.09,64.68 89.54,65.23 89.54,66.55 D7.2 | J3.2 164.4,18.7 152.28,18.7 128.6,42.38 C1_BAT2.2 128.46,42.45 128.46,45.36 129.71,46.6 129.71,47.71 129.5,47.92 128.53,47.92 127.83,47.23 127.83,46.6 125.55,44.32 122.71,44.32 C3.+ 122.57,44.18 121.88,43.49 116.62,43.49 IC4.5 116.48,43.56 116.27,43.77 v114.95,43.77
  Top 0.3: v93.97,53.95 93.76,53.95
  Bottom 0.3: v72.64,27.49 72.57,27.56 v71.67,27.56 71.53,27.63 v63.57,35.59 | v18.42,46.6 16.69,48.34 v9.9,48.34 9.83,48.48 9.28,49.03 9.28,64.75 v4.43,69.6 | v114.95,43.77 104.78,53.95 v93.97,53.95 93.9,54.08 91.76,56.23 91.76,56.58 | 91.76,56.58 v91.76,66.76 | v77.97,34.56 77.97,34.62 77.91,34.69 77.91,56.23 78.25,56.58 91.76,56.58
32KHZ
  Top 0.15: U3.1 90.23,61.7 90.23,61.35 89.19,60.32 89.19,59.76 94.46,54.5 94.46,52.77 93.83,52.15 93.83,51.94 R2_PINH1.1 93.76,51.87 93.76,50.76 81.99,38.99 80.12,38.99 75.76,34.62 28.25,34.62 17.94,44.94 17.94,49.44 U2.9
DN
  Top 0.15: 164.19,54.36 164.4,54.15 164.4,53.67 164.19,53.46 163.64,53.46 J2.B7 | 164.19,54.36 163.64,54.36 J2.A7 | 164.19,54.36 164.19,54.43 165.3,55.54 165.3,57.34 164.75,57.89 163.15,57.89 162.53,58.52 150.59,58.52 148.83,56.76 D1.1
DP
  Top 0.15: 162.81,54.29 162.81,54.64 163.01,54.85 163.57,54.85 J2.B6 | 162.81,54.29 162.81,54.15 163.01,53.95 163.57,53.95 J2.A6 | 162.81,54.29 150.62,54.29 150.13,54.78 148.89,54.78 D1.3
EPD_3V3  (via drill 0.3)
  Top 0.3: v84.28,20.77 83.24,19.74 83.24,15.44 J1.16 | v80.12,25.14 80.12,26.11 C7.1 | v77.35,27.77 76.24,27.77 Q2.2 | v89.47,86.63 89.47,89.4 TP17.TP | v82.34,29.78 84.9,32.34 L1.2
  Bottom 0.3: v84.28,20.77 84.28,20.98 v80.12,25.14 79.98,25.14 v77.35,27.77 77.42,27.91 77.42,29.22 | v89.47,86.63 89.47,68.42 77.42,56.37 77.42,29.22 | v82.34,29.78 78.74,29.78 78.18,29.22 77.42,29.22
EPD_3V3_C  (via drill 0.3)
  Top 0.3: Q2.1 75.97,29.5 73.27,29.5 R_CL1.2 73.2,29.64 72.85,29.98 v72.85,30.26 | v20.57,68.14 20.57,67.03 U2.18 | v68.07,33.59 52.15,33.59 20.91,2.35 18.35,2.35 TP13.TP
  Bottom 0.3: v20.57,68.14 20.57,65.09 27.56,58.1 47.99,58.1 68.83,37.26 68.83,34.28 | v72.85,30.26 68.83,34.28 | v68.07,33.59 68.7,34.21 68.83,34.28
EPD_BUSY  (via drill 0.3)
  Top 0.15: v86.7,16.41 86.7,15.44 J1.9 | 75.07,45.84 60.8,45.84 42.52,64.13 13.02,64.13 10.39,66.76 10.39,66.97 U2.26 | 75.07,45.84 v78.81,45.84 | v75.34,94.67 75.34,107.48 TP9.TP | 75.07,45.84 v75.07,55.19
  Bottom 0.15: v86.7,16.41 86.7,17.59 92.03,22.92 92.03,31.72 78.6,45.15 78.6,45.64 v78.81,45.84 | v75.34,94.67 75.34,61.7 76.8,60.25 76.8,56.92 v75.07,55.19
EPD_CS  (via drill 0.3)
  Top 0.15: v84.21,17.87 85.18,16.9 85.18,15.44 J1.12 | v73.06,24.52 72.37,25.21 D6.1 | R9.1 71.05,28.25 v71.05,26.59 70.98,26.59 70.22,25.83 v66.76,25.83 | v30.12,36.29 20.57,45.84 20.57,49.44 U2.11 | v157.14,63.29 157.14,64.56 TP10.TP | v88.71,18.56 86.22,18.56 v85.87,18.91
  Bottom 0.15: v71.05,26.59 73.06,24.58 v73.06,24.52 79.71,17.87 v84.21,17.87 84.28,17.87 85.32,18.91 v85.87,18.91 | v30.12,36.29 44.18,36.29 54.64,25.83 v66.76,25.83 | v157.14,63.29 150.07,56.23 146.95,56.23 138.29,47.58 138.29,47.16 111.35,20.22 90.37,20.22 v88.71,18.56
EPD_DC  (via drill 0.3)
  Top 0.15: v85.73,16.83 85.73,15.44 J1.11 | v78.46,61.77 78.46,59 | 78.46,59 v78.46,56.02 | v88.57,84.21 89.54,85.18 TP11.TP | v30.89,59.42 29.15,57.69 20.84,57.69 12.95,49.79 12.95,49.51 U2.5 | 78.46,59 v76.31,59
  Bottom 0.15: v85.73,16.83 85.73,17.04 91.76,23.06 91.76,24.1 84.21,31.65 81.51,31.65 78.32,34.83 78.32,55.88 v78.46,56.02 | v78.46,61.77 78.46,74.1 v88.57,84.21 | v30.89,59.42 32.27,59.42 32.69,59 v76.31,59
EPD_RST  (via drill 0.3)
  Top 0.15: v86.22,14.61 86.22,15.37 J1.10 | v158.58,60.59 157.61,61.56 TP12.TP | v21.26,65.16 18.28,65.16 16.76,66.69 16.76,66.97 U2.21 | v72.5,46.33 v57.62,61.22 | v82.41,41.97 v76.87,41.97
  Bottom 0.15: v86.22,14.61 86.42,14.61 89.23,17.42 | 89.23,17.42 91.76,19.94 121.12,19.94 158.58,57.41 v158.58,60.59 | v57.62,61.22 28.05,61.22 24.13,65.13 21.81,65.13 21.78,65.16 v21.26,65.16 | v76.87,41.97 v72.5,46.33 | v82.41,41.97 82.41,41.76 92.31,31.86 92.31,22.78 88.22,18.7 88.22,18.42 89.23,17.42
FLASH_CS  (via drill 0.3)
  Top 0.15: R5.1 57.82,36.22 57.82,36.36 57.13,37.05 57.13,40.16 57.82,40.86 D9.1 57.82,41 v55.82,43 | U2.12 21.81,49.51 21.81,49.72 32.83,60.73 35.46,60.73 U1.1 35.52,60.8 36.22,61.49 43.97,61.49 44.39,61.08 44.39,56.3 44.18,56.09 v44.18,55.88
  Bottom 0.15: v55.82,43 55.82,44.25 v44.18,55.88
GDR  (via drill 0.3)
  Top 0.15: v80.88,14.27 81.3,13.85 89.06,13.85 90.16,14.96 90.16,15.37 J1.2 | v63.16,14.34 62.46,15.03 R4.1 62.53,15.1 62.74,15.3 62.74,18.7 Q3.1
  Bottom 0.15: v80.88,14.27 63.23,14.27 v63.16,14.34
GND  (via drill 0.3)
  Top 0.15: U2.29_9 14.75,58.03 13.57,58.03 U2.29_6 13.5,58.03 12.33,58.03 U2.29_3 12.33,58.1 7.89,62.53 7.89,66.97 U2.28 7.89,67.03 7.89,77.08 16.2,85.39 J4.G1 16.27,85.45 16.27,86.49 17.04,87.25 17.04,90.3 16.27,91.06 J4.G2 16.27,91.13 17.04,91.89 17.04,94.94 16.34,95.63 16.34,99.93 D8.2 16.34,100 16.34,102.08 21.78,107.51 | TP5.TP 2.84,25.55 2.84,30.47 TP4.TP 2.84,30.54 v2.84,33.38 | U2.29_1 12.33,55.54 12.33,56.72 U2.29_2 12.4,56.72 13.5,56.72 U2.29_5 | U2.29_1 12.4,55.54 13.5,55.54 U2.29_4 13.57,55.54 14.75,55.54 U2.29_7 14.82,55.54 14.82,56.72 U2.29_8 14.82,56.78 14.82,57.96 U2.29_9 | v9.83,52.63 7.89,50.69 7.89,49.51 U2.1 7.83,49.44 v7.83,48.34 | v11.91,54.71 11.91,55.12 12.26,55.47 U2.29_1 | C10.2 67.59,109.14 66.83,109.14 65.72,108.03 CHANGE_BUTTON.2 65.65,108.1 62.26,108.1 CHANGE_BUTTON.1 62.19,108.1 60.94,108.1 60.66,108.38 55.95,108.38 55.82,108.24 53.46,108.24 53.32,108.38 51.11,108.38 50.83,108.1 BOOT_BUTTON.2 50.76,108.1 47.3,108.1 BOOT_BUTTON.1 47.23,108.03 46.4,107.2 | 46.4,107.2 46.4,103.32 47.44,102.28 47.58,102.28 IC2.3 47.64,102.21 48.2,101.66 52.7,101.66 53.18,102.14 53.18,102.97 52.49,103.67 52.49,103.81 C_DELAY.2 | J4.G3 2.01,82.48 2.01,89.33 5.4,92.73 J4.P6 5.47,92.73 2.98,95.22 2.98,95.5 J4.G4 2.98,95.63 2.98,98.13 6.72,101.87 6.72,102.08 C9.2 6.79,102.14 9.83,102.14 16,108.31 20.98,108.31 21.78,107.51 | 44.53,109.14 27.7,109.14 C5.2 27.7,109.21 26.94,109.21 25.83,108.1 RESET_BUTTON.2 25.76,108.1 22.37,108.1 RESET_BUTTON.1 22.3,108.03 21.78,107.51 | 44.53,109.14 45.36,109.14 C6.2 | v46.33,107.27 46.33,107.2 46.4,107.2
  Top 0.15: v44.53,109.07 44.53,109.14 | C1_BAT2.1 122.64,41.13 C3.- 122.57,41.13 117.24,41.13 117.1,41 114.47,41 | 109.31,38.95 110.94,37.33 112.05,37.33 112.67,37.95 C1_BAT1.2 112.74,38.02 114.47,39.75 114.47,41 | 109.31,38.95 107.75,40.51 107.75,41.34 R1_PWRUSB.1 | 114.47,41 114.47,41.9 113.92,42.45 113.78,42.45 IC4.2 | 88.78,23.41 87.67,23.41 87.53,23.27 87.53,22.44 88.22,21.74 88.22,21.61 EPD_C10.1 | 88.78,23.41 90.58,21.61 90.79,21.61 EPD_C11.1 90.79,21.68 92.52,23.41 93.69,23.41 93.73,23.37 | 88.78,23.41 88.78,25.76 90.51,27.49 90.51,30.61 D3.1 | 93.73,23.37 93.83,23.27 93.83,22.37 93.21,21.74 93.21,21.61 EPD_C12.1 93.14,21.54 93.14,16.14 91.76,14.75 91.76,12.95 J1.MP1 91.69,12.88 89.54,12.88 89.33,12.67 78.46,12.67 78.25,12.88 J1.MP2 78.18,12.95 78.18,20.91 | D6.2 73.89,25.28 77.7,25.28 78.88,26.45 78.88,26.66 79.22,27.01 80.54,27.01 81.37,26.18 C7.2 81.44,26.11 81.92,26.11 85.04,22.99 85.04,22.51 85.87,21.68 85.87,21.54 EPD_C9.1 85.8,21.54 85.11,20.84 85.11,18.63 87.19,16.55 87.19,15.44 J1.8 87.19,15.37 87.19,14.96 86.36,14.13 83.58,14.13 82.75,14.96 82.75,15.37 J1.17 82.75,15.44 82.75,20.57 83.65,21.47 EPD_C8.1 83.65,21.54 83.03,22.16 83.03,22.58 82.2,23.41 81.16,23.41 81.02,23.27 | SJ1.1 62.19,12.74 62.19,12.95 62.95,13.71 63.16,13.71 63.78,14.34 R4.2 63.85,15.1 66.89,18.14 66.89,18.97 R2.1 66.97,19.04 66.97,21.47 EPD_C2.1 66.69,21.54 69.04,21.54 EPD_C1.1 69.11,21.54 77.49,21.54 EPD_C5.1 77.56,21.54 78.18,20.91 | 81.02,23.27 81.02,22.37 81.65,21.74 81.65,21.54 EPD_C6.1 | 78.88,21.54 79.57,21.54 EPD_C7.1 | 78.88,21.54 78.25,20.91 78.18,20.91
  Top 0.15: 81.02,23.27 80.33,23.27 80.12,23.48 79.01,23.48 78.88,23.34 78.88,21.54 | 93.73,23.37 109.31,38.95 | C5_USB.2 151.24,49.79 151.24,52.01 151.38,52.15 C4_USB.2 151.38,52.22 v151.38,53.39 | J2.B1 163.64,57.27 163.64,57.48 J2.A12 163.57,57.55 v158.1,57.55 | v147.71,55.75 146.74,56.72 145.56,56.72 R2-USB1.2 | v150.34,55.75 151.31,55.75 D1.5 | C1.2 155.26,7.2 153.53,7.2 C2.2 153.53,7.27 153.53,10.32 152.77,11.08 152.77,11.15 | 152.77,11.15 152.07,11.15 151.66,11.56 151.66,11.84 SENSOR2.7 151.59,11.91 151.59,12.88 150.83,13.64 150.83,14.75 SENSOR2.1 | 152.77,11.15 153.18,11.56 153.18,11.84 SENSOR2.5 153.25,11.91 159,17.66 164.4,17.66 J3.1 164.47,17.73 164.81,17.73 165.37,18.28 165.37,49.1 | J2.B12 163.64,51.11 163.64,50.83 J2.A1 163.64,50.76 163.64,49.58 164.12,49.1 J2.MP3 164.19,49.1 165.37,49.1 | 165.37,49.1 166.13,49.1 | 166.13,49.1 168.07,49.1 J2.MP1 | 155.19,59.21 164.12,59.21 J2.MP4 164.19,59.28 166.13,59.28 | 155.19,59.21 153.8,59.21 R2-USB.2 153.74,59.14 126.73,59.14 123.82,56.23 C1_BAT.2 123.75,56.23 119.32,56.23 | 166.13,59.28 168.07,59.28 J2.MP2 | 166.13,59.28 166.13,49.1 | v155.19,59.14 155.19,59.21 | U1.4 35.46,56.99 35.46,57.27 34.76,57.96 34.76,58.45 35.11,58.79 39.33,58.79 U1.9 39.4,58.93 40.44,58.93 42.73,61.22 43.84,61.22 43.97,61.08 43.97,56.3 43.52,55.85 | 43.52,55.85 38.64,50.97 38.64,50.34 D12.2 38.64,50.28 38.64,50.07 44.18,44.53 44.18,42.59 D11.2 44.25,42.52 47.58,42.52 47.64,42.45 51.38,42.45 D10.2 51.45,42.45 52.49,43.49 55.95,43.49 56.99,42.45 57.82,42.45 D9.2 57.89,42.45 76.87,42.45 86.42,52.01 U3.13 86.49,52.42 86.49,52.01 v88.99,49.51
  Top 0.15: U4.9 132.34,54.29 132.34,54.15 131.78,53.6 131.44,53.6 U4.4 131.37,53.53 131.37,51.38 128.53,48.54 124.3,48.54 121.6,51.24 121.53,51.24 | U4.1 131.44,55.05 131.78,55.05 132.34,54.5 132.34,54.36 U4.9 | U4.6 133.31,54.08 132.34,54.08 U4.9 | C2_BAT.2 109.48,53.81 111.15,53.81 112.32,54.98 v118.35,54.98 118.42,54.98 120.36,53.05 120.63,53.05 MCP73831.2 120.7,52.98 120.91,52.98 121.53,52.35 121.53,51.24 | 121.53,51.24 118.14,47.85 118.14,47.71 R2_BAT.1 | v90.58,48.27 91,48.68 91,49.1 C8.2 | 119.32,56.23 119.04,56.23 118.83,56.44 101.38,56.44 99.23,54.29 97.23,54.29 C10_SUPERCAP.1 97.16,54.22 96.4,53.46 v96.4,53.18 | v119.32,56.16 119.32,56.23 | 114.47,41 113.08,41 v112.95,41.13 | 43.52,55.85 43.97,55.4 44.32,55.4 44.67,55.75 44.67,61.22 44.11,61.77 32.62,61.77 28.81,57.96 14.89,57.96 U2.29_9
  Bottom 0.15: v11.91,54.71 v9.83,52.63 | v2.84,33.38 2.84,43.35 v7.83,48.34 | v44.53,109.07 v46.33,107.27 | v150.34,55.75 v147.71,55.75 | 155.19,57.55 152.21,57.55 150.41,55.75 v150.34,55.75 | 155.19,57.55 v158.1,57.55 | v151.38,53.39 151.38,54.71 v150.34,55.75 | v155.19,59.14 155.19,57.55 | v88.99,49.51 90.23,48.27 v90.58,48.27 91.48,48.27 v96.4,53.18 | v119.32,56.16 118.35,55.19 v118.35,54.98 118.35,46.54 v112.95,41.13
  pour Top: 6.26,49.16 6.24,49.14 6.22,49.12 0.18,49.12 0.18,0.08 0.17,0.08 75.92,0.08 75.92,10.02 75.94,10.04 75.96,10.06 75.98,10.08 94.22,10.08 94.24,10.06 94.26,10.04 94.28,10.02 94.28,0.08 170.12,0.08 170.12,67.12 92.18,67.12 92.16,67.14 92.14,67.16 92.12,67.18 92.12,111.12 0.18,111.12 0.18,67.28 6.22,67.28 6.24,67.26 6.26,67.24 6.28,67.22 6.28,49.18
  pour Bottom: 6.26,49.16 6.24,49.14 6.22,49.12 0.18,49.12 0.18,0.08 0.17,0.08 75.92,0.08 75.92,10.02 75.94,10.04 75.96,10.06 75.98,10.08 94.22,10.08 94.24,10.06 94.26,10.04 94.28,10.02 94.28,0.08 170.12,0.08 170.12,67.12 92.18,67.12 92.16,67.14 92.14,67.16 92.12,67.18 92.12,111.12 0.18,111.12 0.18,67.28 6.22,67.28 6.24,67.26 6.26,67.24 6.28,67.22 6.28,49.18
GPIO8
  Top 0.15: R1.1 19.32,45.5 19.32,45.7 19.94,46.33 19.94,48.54 19.32,49.17 19.32,49.44 U2.10
I2C_PW  (via drill 0.3)
  Top 0.15: C1.1 155.26,5.89 153.53,5.89 C2.1 153.46,5.89 152.9,5.89 151.73,7.06 R1_PINH.2 151.66,7.13 150.83,7.13 | 150.83,7.13 149.79,7.13 R2-PINH.2 | 150.83,7.13 150.83,11.84 SENSOR2.8 150.76,11.91 150.76,13.3 150.34,13.71 150.34,15.37 150.79,15.82 | SENSOR2.6 152.35,11.91 152.35,12.53 151.66,13.23 151.66,14.75 SENSOR2.2 151.59,14.82 151.59,15.03 150.79,15.82 | v22.71,68.14 21.81,67.24 21.81,67.03 U2.17 | v66.27,65.86 71.95,60.18 71.95,60.11 80.54,51.52 80.75,51.52 v83.03,49.24 | v111.35,20.91 145.7,20.91 150.79,15.82
  Bottom 0.15: v22.71,68.14 63.99,68.14 v66.27,65.86 | v111.35,20.91 v83.03,49.24
INT_RTC  (via drill 0.3)
  Top 0.15: v89.68,59.97 93.69,59.97 R1_PINH1.1 | U3.3 87.81,61.7 88.22,61.29 v88.22,60.39 88.22,56.09 90.86,53.46 90.86,50.07 90.3,49.51 90.3,48.61 80.95,39.27 v66.06,39.27 | 17.38,34.14 17.38,5.75 14.06,2.42 TP15.TP | 17.38,34.14 17.38,34.9 16.76,35.52 16.76,49.44 U2.8 | 17.38,34.14 v60.94,34.14
  Bottom 0.15: v89.68,59.97 88.64,59.97 v88.22,60.39 | v60.94,34.14 v66.06,39.27
IO/BOOT
  Top 0.15: R_BOOT.2 52.7,109.14 51.24,109.14 50.83,109.55 BOOT_BUTTON.3 50.76,109.62 47.3,109.62 BOOT_BUTTON.4 47.23,109.62 45.43,107.82 C6.1 45.36,107.75 24.38,86.77 24.38,67.03 U2.15
IO/CHANGE  (via drill 0.3)
  Top 0.15: C10.1 67.66,107.89 67.66,108.1 68.28,108.72 68.28,109.62 68.14,109.76 65.86,109.76 65.72,109.62 CHANGE_BUTTON.3 65.65,109.62 62.26,109.62 CHANGE_BUTTON.4 62.19,109.55 61.77,109.14 60.18,109.14 R_CHANGE.2 60.11,109.07 59.76,108.72 v55.68,108.72 | v23.89,76.94 14.2,67.24 14.2,67.03 U2.23
  Bottom 0.15: v55.68,108.72 v23.89,76.94
MISO  (via drill 0.3)
  Top 0.15: U1.2 35.46,59.55 34.49,58.59 34.49,50.62 35.94,49.17 35.94,49.03 R8.1 36.01,48.89 v36.63,48.27 36.63,48.2 29.09,40.65 v29.09,37.95 | v38.36,47.92 38.57,48.13 38.57,48.75 D12.1 | v17.38,58.45 9.14,66.69 9.14,66.97 U2.27 | v6.79,93 6.03,93.76 5.82,93.76 J4.P7 | v15.93,34.21 2.91,21.19 TP6.TP
  Bottom 0.15: v38.36,47.92 36.98,47.92 v36.63,48.27 36.56,48.27 26.38,58.45 v17.38,58.45 17.38,58.52 6.79,69.11 v6.79,93 | v15.93,34.21 15.93,34.42 19.46,37.95 v29.09,37.95
MOSI  (via drill 0.3)
  Top 0.15: J4.P3 5.75,89.4 4.85,88.5 4.85,86.77 6.58,85.04 6.58,48.96 7.69,47.85 14.06,47.85 15.44,49.24 15.44,49.44 U2.7 15.17,48.89 v16.27,47.78 | U1.5 43.28,56.92 43.28,56.3 37.88,50.9 37.88,47.37 44.18,41.06 D11.1 44.25,41 v44.25,38.43 | v84.28,14.61 84.28,15.37 J1.14 | v69.39,35.11 45.36,35.11 44.11,36.36 R7.1 44.18,36.36 v44.8,36.98 | v85.66,94.67 85.66,107.27 TP7.TP
  Bottom 0.15: v84.28,14.61 84.28,16 91.48,23.2 91.48,23.96 91.33,24.11 90.1,24.11 86.22,20.22 84.21,20.22 80.4,24.03 80.4,24.1 v69.39,35.11 69.39,48.89 77.08,56.58 77.08,73.13 85.66,81.72 v85.66,94.67 | v44.8,36.98 44.25,37.53 v44.25,38.43 25.97,38.43 16.62,47.78 v16.27,47.78
N$1
  Top 0.15: R2-USB.1 153.8,57.89 157.13,57.89 159.07,55.95 163.57,55.95 J2.B5
N$2
  Top 0.15: R2-USB1.1 145.56,55.4 146.81,55.4 148.33,53.88 162.11,53.88 163.01,52.98 163.57,52.98 J2.A5
N$3
  Top 0.15: C1_BAT1.1 111.35,38.02 111.35,38.64 110.66,39.33 110.66,40.93 D2.1 110.73,40.93 111.84,40.93 113.02,42.1 113.08,42.1 | 113.08,42.1 113.22,41.97 113.29,41.97 113.71,41.55 IC4.3 | 113.08,42.1 113.08,42.87 113.71,43.49 IC4.1 113.85,43.42 113.92,43.42 114.4,42.94 124.72,42.94 128.94,47.16 Q1.2
N$4
  Top 0.15: R1_BAT.1 112.81,52.01 113.02,52.01 113.64,51.38 116.2,51.38 117.38,52.56 119.94,52.56 120.43,52.08 120.63,52.08 MCP73831.1
N$5
  Top 0.15: C4.1 97.5,34.97 94.53,34.97 94.04,34.49 D4.1 94.04,34.42 94.04,30.68 D3.2
N$6
  Top 0.15: CHG_LED.C 113.02,53.81 113.02,53.12 114.06,52.08 R1_BAT.2
N$7
  Top 0.15: R2_BAT.2 118.14,49.03 118.14,52.01 MCP73831.5
N$8
  Top 0.15: J1.4 89.19,15.44 89.19,19.46 87.05,21.61 87.05,33.73 82.48,38.3 80.26,38.3 72.16,30.19 72.16,26.38 69.11,23.34 69.11,22.85 EPD_C1.2
N$9  (via drill 0.3)
  Top 0.15: v85.59,20.71 85.39,20.5 85.39,18.77 85.87,18.28 86.22,18.28 88.71,15.79 88.71,15.44 J1.5 | v79.36,26.52 75.07,22.23 67.24,22.23 66.69,22.78 EPD_C2.2
  Bottom 0.15: v85.59,20.71 85.18,20.71 v79.36,26.52
N$10
  Top 0.15: J1.15 83.72,15.44 83.72,19.6 84.76,20.64 84.76,22.85 83.17,24.45 79.15,24.45 77.56,22.85 EPD_C5.2
N$11
  Top 0.15: J1.18 82.27,15.44 82.27,20.98 82.41,21.12 82.41,22.09 81.72,22.78 EPD_C6.2
N$12
  Top 0.15: J1.19 81.72,15.44 81.72,20.36 80.26,21.81 80.26,22.23 79.64,22.85 EPD_C7.2
N$13  (via drill 0.3)
  Top 0.15: v81.16,19.04 81.16,15.44 J1.20 | v79.92,23.96 82.55,23.96 83.65,22.85 EPD_C8.2
  Bottom 0.15: v81.16,19.04 81.16,19.18 79.92,20.43 v79.92,23.96
N$15
  Top 0.15: J1.22 80.26,15.37 80.26,14.27 81.3,13.23 89.06,13.23 90.58,14.75 90.92,14.75 91.13,14.96 91.13,19.94 88.29,22.78 EPD_C10.2
N$16
  Top 0.15: C_DELAY.1 52.42,102.56 52.01,102.56 50.48,104.08 IC2.5
N$17
  Top 0.15: D7.1 87.46,66.55 87.46,64.82 88.09,64.19 R_CAPACITOR.1
N$18
  Top 0.15: J1.24 79.22,15.37 79.22,14.89 81.16,12.95 89.19,12.95 90.72,14.47 91.06,14.47 92.52,15.93 92.52,22.16 93.14,22.78 EPD_C12.2
N$22  (via drill 0.35)
  other vias: 74.2,33.2
PREVGH  (via drill 0.3)
  Top 0.3: v80.68,18.56 80.68,15.44 J1.21 | v77.84,26.04 77.84,26.18 79.08,27.42 79.57,27.42 | 79.57,27.42 81.37,27.42 85.94,22.85 EPD_C9.2 | 79.57,27.42 79.57,35.11 81.02,36.56 81.02,37.6 D5.1
  Bottom 0.3: v80.68,18.56 80.68,18.77 77.84,21.61 v77.84,26.04
PREVGL  (via drill 0.3)
  Top 0.3: v81.16,19.8 79.78,18.42 79.78,15.44 J1.23 | v89.89,22.92 90.72,22.92 90.79,22.85 EPD_C11.2 90.44,23.06 90.44,25.97 91.48,27.01 91.48,31.16 90.51,32.13 90.51,34.42 D4.2
  Bottom 0.3: v81.16,19.8 86.77,19.8 v89.89,22.92
RESE  (via drill 0.3)
  Top 0.15: v89.68,16.2 89.68,15.44 J1.3 | v67.03,13.78 66.69,13.78 66.2,13.3 R3.1 66.13,13.23 64.54,11.63 61.49,11.63 61.29,11.84 61.29,18.28 62.46,19.46 63.09,19.46 63.78,18.77 64.06,18.77 Q3.2
  Bottom 0.15: v89.68,16.2 88.43,16.2 86.01,13.78 v67.03,13.78
RESE`
  Top 0.15: SJ1.2 63.71,12.74 65.51,14.54 66.13,14.54 R3.2 66.2,14.61 68.14,16.55 68.14,18.97 R2.2
RESET  (via drill 0.3)
  Top 0.15: R_RESET.2 20.5,109.07 21.81,109.07 22.3,109.55 RESET_BUTTON.4 22.37,109.62 25.76,109.62 RESET_BUTTON.3 25.83,109.62 25.9,109.69 v26.87,109.69 | v27.01,108.65 27.7,107.96 C5.1 | v46.88,104.84 47.58,104.15 IC2.1 | v10.32,55.05 10.32,49.51 U2.3
  Bottom 0.15: v27.01,108.65 27.01,109.55 v26.87,109.69 | v46.88,104.84 30.89,104.84 27.08,108.65 v27.01,108.65 | v10.32,55.05 10.32,64.68 4.22,70.77 4.22,91.48 21.4,108.65 v27.01,108.65
RTC_RST  (via drill 0.3)
  Top 0.15: v24.17,65.86 23.96,65.86 23.13,66.69 23.13,66.97 U2.16 | v73.75,62.26 80.33,62.26 81.09,63.02 85.52,63.02 86.42,62.12 86.42,61.77 U3.4
  Bottom 0.15: v24.17,65.86 24.17,65.51 27.42,62.26 v73.75,62.26
RX
  Top 0.15: U2.24 12.95,66.97 12.95,66.69 13.85,65.79 17.24,65.79 18.35,64.68 63.78,64.68 81.23,82.13 89.96,82.13 90.72,81.37 90.72,78.74 89.54,77.56 TP2.TP
SCK  (via drill 0.3)
  Top 0.15: v84.21,17.24 84.69,16.76 84.69,15.44 J1.13 | 52.28,36.22 51.59,36.22 R6.1 | 52.28,36.22 v56.99,36.22 | v43.35,57.55 43.35,58.17 U1.6 | 52.28,36.22 52.28,38.02 51.45,38.85 51.45,40.86 D10.1 | v15.1,50.62 14.2,49.72 14.2,49.51 U2.6 | v4.71,91.27 5.05,91.62 5.75,91.62 J4.P5 | v76.73,107.34 80.12,107.34 TP8.TP
  Bottom 0.15: v84.21,17.24 75.97,17.24 v56.99,36.22 56.99,36.29 43.35,49.93 | 43.35,49.93 v43.35,57.55 | 43.35,49.93 43.28,49.93 40.79,47.44 36.84,47.44 33.66,50.62 v15.1,50.62 15.1,60.32 4.71,70.7 v4.71,91.27 4.71,91.55 6.65,93.49 36.15,93.49 51.87,109.21 55.82,109.21 57.69,107.34 v76.73,107.34
SCL  (via drill 0.3)
  Top 0.15: v150.83,5.89 149.79,5.89 R2-PINH.1 | v152.84,13.85 152.84,14.13 153.18,14.47 153.18,14.75 SENSOR2.4 | v136.84,48.27 136.84,51.38 133.65,54.57 133.38,54.57 U4.7 | 162.08,23.03 164.4,20.71 J3.4 | 162.08,23.03 v137.81,47.3 | v162.04,22.99 162.08,23.03 | v19.39,68.63 18,67.24 18,67.03 U2.20 | v74.86,61.77 74.86,59 v79.98,53.88 | v89.19,53.88 90.23,52.84 90.23,52.49 U3.16
  Bottom 0.15: v150.83,5.89 150.97,5.89 152.84,7.76 v152.84,13.85 152.9,13.85 v162.04,22.99 | v137.81,47.3 v136.84,48.27 120.7,48.27 111.42,38.99 110.11,38.99 101.31,47.78 90.09,47.78 88.5,49.38 88.5,50.14 89.26,50.9 89.26,53.88 v89.19,53.88 v79.98,53.88 | v19.39,68.63 68,68.63 v74.86,61.77
SDA  (via drill 0.3)
  Top 0.15: v150.97,6.51 151.03,6.51 151.66,5.89 R1_PINH.1 | v152.14,13.85 152.14,14.54 152.35,14.75 SENSOR2.3 | 137.32,46.47 137.32,51.38 133.65,55.05 133.38,55.05 U4.8 | 161.04,22.75 164.12,19.67 164.4,19.67 J3.3 | 161.04,22.75 137.32,46.47 | v161.01,22.64 161.01,22.71 161.04,22.75 | v65.93,65.37 66.27,65.37 v80.61,51.04 | v88.78,51.04 88.78,52.22 88.99,52.42 U3.15 | U2.19 19.32,66.97 19.32,66.69 19.97,66.04 22.2,66.04 22.87,65.37 v24.93,65.37 | v130.26,46.47 137.32,46.47
  Bottom 0.15: v150.97,6.51 150.97,12.67 v152.14,13.85 152.21,13.85 v161.01,22.64 | v65.93,65.37 v24.93,65.37 | v88.78,51.04 88.22,51.04 | 88.22,51.04 v80.61,51.04 | v130.26,46.47 119.32,46.47 111.56,38.71 98.75,38.71 88.22,49.24 88.22,51.04
SRC  (via drill 0.3)
  Top 0.15: 85.07,37.08 84.55,37.6 D5.2 84.48,37.67 83.58,38.57 80.12,38.57 75.9,34.35 74.65,34.35 63.43,23.13 63.43,20.84 Q3.3 | 85.07,37.08 85.8,36.36 97.5,36.36 C4.2 | v84.07,36.08 80.4,32.41 L1.1 | 85.07,37.08 v84.83,36.84
  Bottom 0.15: v84.83,36.84 v84.07,36.08
SS_SD
  Top 0.15: D8.1 14.75,100 14.2,100.55 10.73,100.55 R10.1 10.73,100.48 10.73,92.86 6.23,88.36 J4.P2 6.23,88.29 6.86,87.67 6.86,59.14 11.63,54.36 11.63,49.51 U2.4
TX
  Top 0.15: U2.25 11.7,66.97 11.7,66.69 13.99,64.4 64.19,64.4 80.68,80.88 89.4,80.88 TP1.TP
USB_D+  (via drill 0.3)
  Top 0.15: v99.86,57.41 90.03,67.24 77.42,67.24 v71.81,61.63 | v34.35,59.49 24.38,49.51 U2.14 | D1.4 151.31,54.85 150.62,54.85 149.68,55.78 149.68,57.05 149.94,57.3 149.98,57.3 v150.13,57.46
  Bottom 0.15: v71.81,61.63 69.67,59.49 v34.35,59.49 | v99.86,57.41 150.09,57.41 v150.13,57.46
USB_D-  (via drill 0.3)
  Top 0.15: v101.11,56.78 90.37,67.52 76.73,67.52 v70.98,61.77 | v33.31,59.97 23.13,49.79 23.13,49.51 U2.13 | v150.11,56.88 150.2,56.78 151.26,56.78 D1.6
  Bottom 0.15: v70.98,61.77 58.79,61.77 56.99,59.97 v33.31,59.97 | v101.11,56.78 150.02,56.78 v150.11,56.88
VBAT  (via drill 0.3)
  Top 0.3: U4.2 131.44,54.57 131.44,54.08 U4.3 131.23,54.08 130.95,54.08 128.11,51.24 | 128.11,51.24 128.11,49.31 Q1.3 | v16.9,34.76 2.7,34.76 TP3.TP | v49.72,42.94 50.55,42.94 52.91,45.29 v79.08,45.29 | v87.67,43.97 99.17,43.97 v107.34,52.15 | v108.1,52.91 108.1,53.67 C2_BAT.1 108.24,53.81 109.97,55.54 118.56,55.54 120.15,53.95 120.63,53.95 MCP73831.3 120.77,53.88 121.12,53.88 123.68,51.31 127.97,51.31 128.11,51.24
  Bottom 0.3: v16.9,34.76 27.84,34.76 29.92,36.84 44.18,36.84 44.6,36.42 45.01,36.42 49.72,41.13 v49.72,42.94 | v79.08,45.29 86.36,45.29 v87.67,43.97 | v108.1,52.91 v107.34,52.15
VBUS  (via drill 0.3)
  Top 0.3: PFMF.050.1.2 151.38,43.35 150,44.74 150,49.65 C5_USB.1 149.93,49.79 149.93,52.01 150.06,52.15 C4_USB.1 149.79,52.08 147.64,52.08 144.73,54.98 144.73,57.41 | 144.73,57.41 146.81,57.41 148.4,55.82 148.82,55.82 D1.2 | 144.73,57.41 132.82,57.41 130.33,54.91 123.82,54.91 C1_BAT.1 123.68,54.98 119.73,54.98 118.69,56.02 109.21,56.02 107.48,54.29 107.48,52.77 107.89,52.35 112.12,52.35 | MCP73831.4 118.07,53.88 114.54,53.88 CHG_LED.A 114.4,53.95 114.12,53.95 113.5,54.57 112.46,54.57 112.12,54.22 112.12,52.35 | 112.12,44.32 111.98,44.32 110.73,43.07 D2.2 110.59,43 110.31,42.73 107.75,42.73 R1_PWRUSB.2 107.68,42.59 91,25.9 v91,23.68 | 112.12,44.32 115.99,44.32 118.83,47.16 127.07,47.16 Q1.1 | v77.7,14.75 65.37,2.42 TP14.TP | 112.12,44.32 112.12,52.35
  Bottom 0.3: v77.7,14.75 80.61,14.75 82.55,16.69 84.42,16.69 91,23.27 v91,23.68
VRTC  (via drill 0.3)
  Top 0.3: R_CAPACITOR.2 89.33,64.13 88.29,63.09 87.39,63.09 87.12,62.81 87.12,53.12 87.74,52.49 U3.14 87.81,52.35 87.81,51.24 88.57,50.48 88.78,50.48 89.68,49.58 | 89.68,49.58 89.68,49.17 C8.1 | v94.6,52.01 97.16,52.01 C10_SUPERCAP.2 | v90.16,50 89.82,49.65 89.68,49.58
  Bottom 0.3: v94.6,52.01 92.17,52.01 v90.16,50
VUSB  (via drill 0.3)
  Top 0.3: J2.A9 163.64,56.65 163.64,56.44 J2.B4 163.5,56.44 v162.67,56.44 | J2.B9 163.64,51.87 163.64,51.66 J2.A4 163.5,51.59 162.67,51.59 | 162.67,51.59 152.28,41.2 149.03,41.2 146.95,43.28 PFMF.050.1.1 | v162.67,51.73 162.67,51.59
  Bottom 0.3: v162.67,51.73 v162.67,56.44

## Text on the board
tPlace: SCK | MOSI | EPD_BUSY | 3V3 | EPD_3V3 | EPD_DC | TX | RX | EPD_CS | EPD_RST | VBAT | GND | GND | MISO | EPD_3V3_C | VBUS | INT_RTC